# Altium PCB FPGA-Oscilloscope-route-01.PcbDoc (part 4 of 4)
Units mil, origin at the board's own origin, x right, y up, seen from the top; angles counter-clockwise.
Board outline 8300 x 5800 mil, 2 copper layers (Top Layer, Bottom Layer); 257 components, 397 nets, 1971 pads, 530 vias.
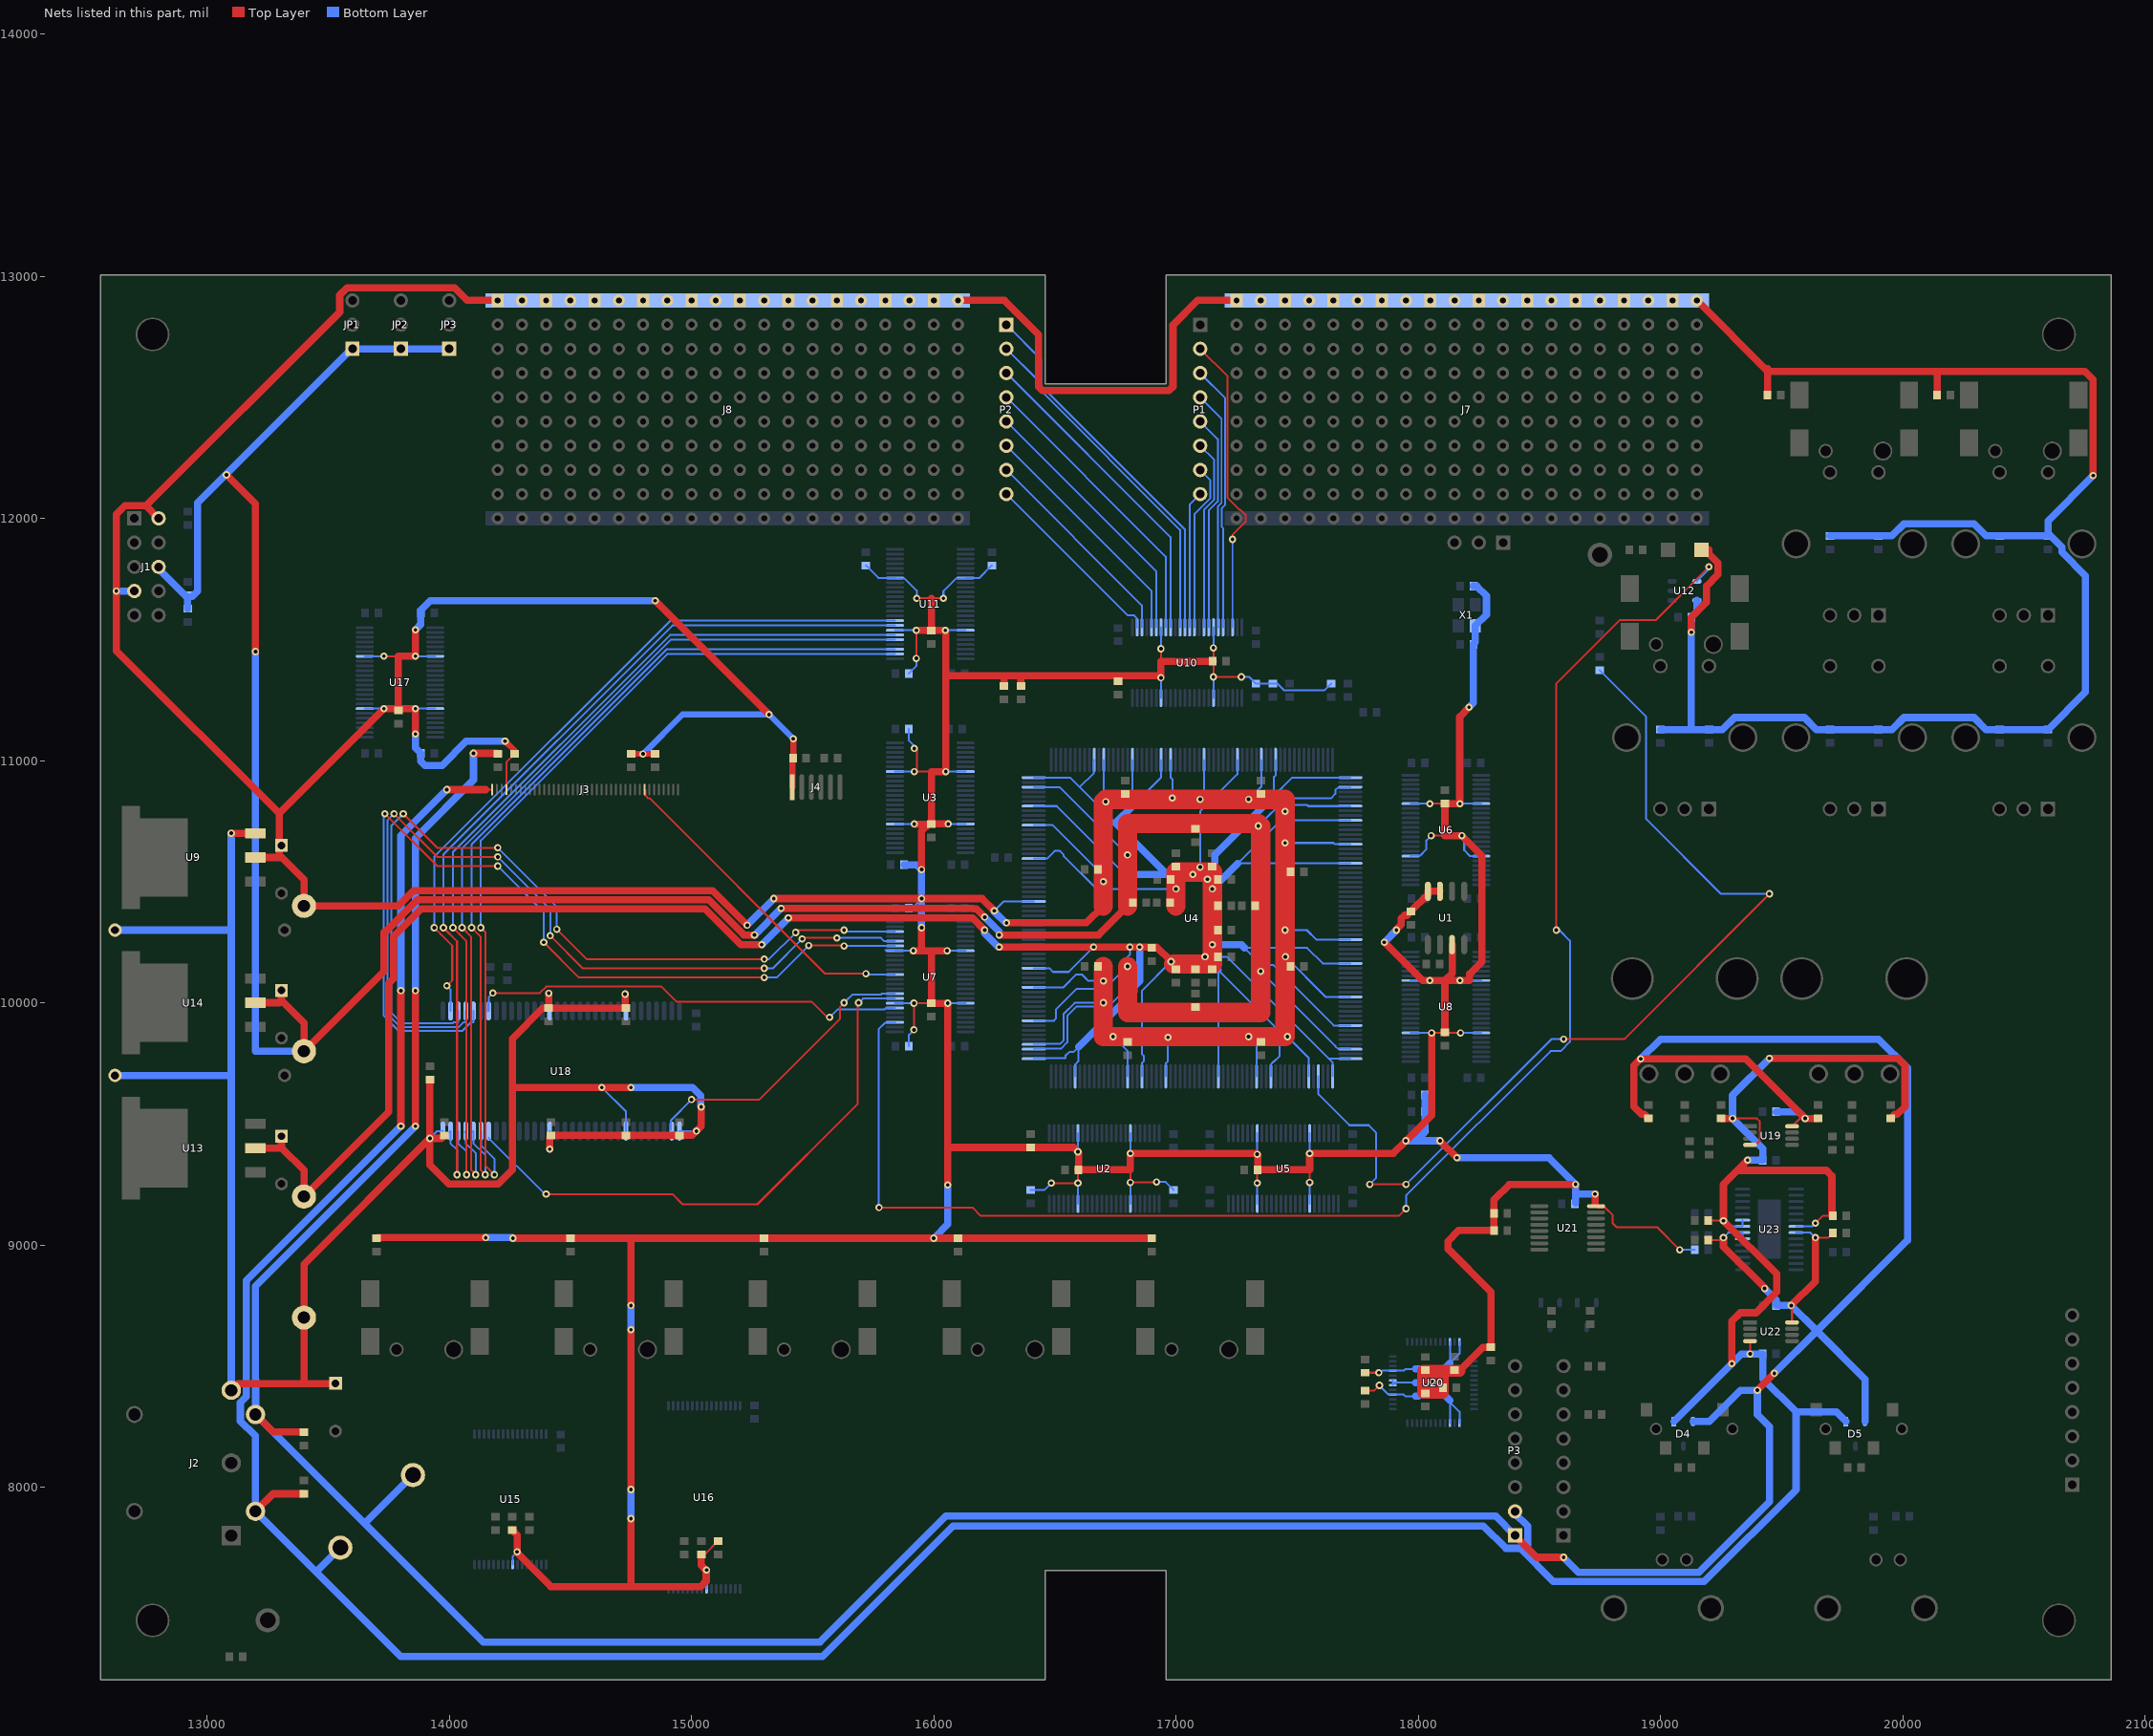
[diagram p4: the nets of this part, all layers, seen from the top]

## Via types
v1: diameter 30, hole 15, Top Layer to Bottom Layer, 530 vias

## Nets (pads, with @x,y where several pads share a name; then routed paths per layer and width w, separated by ;. In a path a pad name is that pad's centre, name@x,y a point inside that pad or via, vN(x,y) a via of type N, cw(c..) or ccw(c..) an arc to the next point about the centre after c; other vN are vias at no path point) (continued)
UB1: P1.2 U10.22 | length 1251.6
  Top Layer w7.8: P1.2@17100,12700 17213.3,12586.7 17213.3,12084.8 17261.4,12036.7 17265.2,12036.7 17286.7,12015.2 17286.7,11984.8 17233.38,11931.48 v1(17233.38,11913.38)
  Bottom Layer w7.8: U10.22@17233.38,11550 v1(17233.38,11913.38)
UB2: P1.3 U10.20 | length 1101.6
  Bottom Layer w7.8: P1.3@17100,12600 17203.63,12496.37 17203.63,12055.89 17188.3,12040.56 17188.3,11965.15 17194.01,11959.44 U10.20@17194.01,11550
UB3: P1.4 U10.19 | length 993.5
  Bottom Layer w7.8: P1.4@17100,12500 17188.03,12411.97 17188.03,12063.54 17172.7,12048.21 17172.7,11551.63 U10.19@17174.33,11550
UB4: P1.5 U10.17 | length 895.5
  Bottom Layer w7.8: P1.5@17100,12400 17172.43,12327.57 17172.43,12070 17134.96,12032.53 U10.17@17134.96,11550
UB5: P1.6 U10.16 | length 790.8
  Bottom Layer w7.8: P1.6@17100,12300 17156.83,12243.17 17156.83,12076.46 17115.27,12034.91 U10.16@17115.27,11550
UB6: P1.7 U10.14 | length 694.1
  Bottom Layer w7.8: U10.14@17075.9,11550 17075.9,12017.6 17141.23,12082.92 17141.23,12158.77 P1.7@17100,12200
UB7: P1.8 U10.13 | length 568.1
  Bottom Layer w7.8: U10.13@17056.22,11550 17056.22,12056.22 P1.8@17100,12100
UB8: P2.1 U10.12 | length 1555.1
  Bottom Layer w7.8: P2.1@16300,12800 16443.3,12656.7 16443.3,12548.08 17036.53,11954.85 U10.12@17036.53,11550
UB9: P2.2 U10.11 | length 1446.9
  Bottom Layer w7.8: P2.2@16300,12700 16427.7,12572.3 16427.7,12541.62 17016.85,11952.47 U10.11@17016.85,11550
UB10: P2.3 U10.9 | length 1330.6
  Bottom Layer w7.8: P2.3@16300,12600 16977.48,11922.52 U10.9@16977.48,11550
UB11: P2.4 U10.8 | length 1222.5
  Bottom Layer w7.8: P2.4@16300,12500 16957.79,11842.21 U10.8@16957.79,11550
UB12: P2.5 U10.6 | length 1106.2
  Bottom Layer w7.8: P2.5@16300,12400 16918.42,11781.58 U10.6@16918.42,11550
UB13: P2.6 U10.5 | length 998
  Bottom Layer w7.8: P2.6@16300,12300 16898.74,11701.26 U10.5@16898.74,11550
UB14: P2.7 U10.3 | length 881.7
  Bottom Layer w7.8: P2.7@16300,12200 16859.37,11640.63 U10.3@16859.37,11550
UB15: P2.8 U10.2 | length 789
  Bottom Layer w7.8: P2.8@16300,12100 16800.9,11599.1 16827.29,11599.1 16837.61,11588.79 16837.61,11552.08 U10.2@16839.68,11550
V12+: C22.2 C54.2 C61.1 C62.1 C64.2 D4.2 D5.2 J2.4 JP4.1 P3.1 R62.1 R89.1 R90.1 U19.8 U22.8 U23.8 U23.20 U23.21 | length 17451.3
  Top Layer w8: C61.1@19197.56,9020 19250,9020 v1(19260,9030) ; v1(19540,8750) 19543.23,8746.77 U22.8@19543.23,8680 ; U19.8@19543.23,9490 19575.67,9522.44 v1(19597.56,9522.44) ; v1(19640,9030) 19692.44,9030 C64.2@19712.44,9050
  Top Layer w30: J2.4@13200,8300 13272.44,8227.56 C22.2@13400,8227.56 ; v1(13860,9490) v1(13860,10050) ; v1(14100,11030) R62.1@14197.56,11030 ; P3.1@18400,7800 18490,7710 v1(18600,7710) ; R89.1@18950,9522.44 18933.43,9539.01 18922.84,9539.01 18890.19,9571.66 18890.19,9740.19 v1(18918.47,9768.47) 19351.53,9768.47 v1(19597.56,9522.44) R90.1@19650,9522.44 ; v1(19260,9030) 19260,8993.46 19430,8823.46 v1(19430,8820) ; v1(19400,8400) v1(19470,8470) ; v1(19540,8750) 19640,8850 v1(19640,9030)
  Bottom Layer w8: v1(19260,9030) 19280.87,9050.87 U23.21@19339.53,9050.87 U23.20@19339.53,9025.28 ; U23.8@19560,9050.87 19619.13,9050.87 v1(19640,9030)
  Bottom Layer w30: 13655,7855 JP4.1@13850,8050 ; v1(13860,9490) 13200,8830 13200,8442.27 13200.6,8441.67 13200.6,8300.6 J2.4@13200,8300 14140,7360 15530,7360 16050,7880 18320,7880 P3.1@18400,7800 ; v1(13860,10050) 13860,10680 14100,10920 v1(14100,11030) ; v1(18600,7710) 18662.2,7647.8 19157.8,7647.8 19450,7940 19450,8250 19400,8300 v1(19400,8400) 19330,8400 19201.18,8271.18 D4.2@19134.49,8271.18 ; v1(18918.47,9768.47) 19000,9850 19900,9850 20020,9730 20020,9020 19645,8645 ; v1(19430,8820) 19477.56,8772.44 C54.2@19477.56,8750 v1(19540,8750) 19645,8645 ; v1(19470,8470) 19645,8645 ; C62.1@19477.56,9550 19570,9550 v1(19597.56,9522.44) ; D5.2@19844.49,8271.18 19844.49,8445.51 19645,8645
V12-: C23.2 C58.2 C65.2 C67.1 C68.1 D4.1 D5.1 J2.2 J3.1 JP5.1 P3.2 R91.1 R92.1 U19.4 U22.4 U23.7 U23.22 U23.23 | length 16289.7
  Top Layer w8: 14150,10880 14175.6,10880 J3.1@14176.22,10880.63 ; C67.1@19197.56,9100 v1(19260,9100) ; v1(19297.56,9522.44) 19397.56,9522.44 19410.34,9509.66 19410.34,9430.26 19398.24,9418.16 19374.93,9418.16 U19.4@19370,9413.23 ; v1(19370,8550) U22.4@19370,8603.23 ; v1(19640,9090) 19670,9120 C68.1@19712.44,9120
  Top Layer w30: J2.2@13200,7900 13272.44,7972.44 C23.2@13400,7972.44 ; v1(13800,9490) v1(13800,10050) ; v1(13990,10880) 14150,10880 ; R91.1@19250,9522.44 v1(19297.56,9522.44) ; v1(19294.57,8510) 19294.57,8684.57 19330,8720 19394.41,8720 19480,8805.59 19480,8880 v1(19260,9100) 19260,9250 19318.77,9308.77 ; v1(19360,9350) 19318.77,9308.77 ; v1(19450,9770) 19980,9770 20009.81,9740.19 20009.81,9571.66 19977.16,9539.01 19966.57,9539.01 R92.1@19950,9522.44 ; C68.1@19712.44,9120 19707.8,9120 19707.8,9285.66 19685.66,9307.8 19322.2,9307.8 19321.23,9308.77 19318.77,9308.77
  Bottom Layer w8: v1(19260,9100) 19283.54,9076.46 U23.22@19339.53,9076.46 U23.23@19339.53,9102.05 ; U23.7@19560,9076.46 19626.46,9076.46 v1(19640,9090)
  Bottom Layer w30: JP5.1@13550,7750 13450,7650 ; v1(13800,9490) 13162.2,8852.2 13162.2,8426.61 13162.8,8426.01 13162.8,8373.99 13137.2,8348.39 13137.2,8273.99 13200,8211.19 J2.2@13200,7900 13450,7650 ; v1(13800,10050) 13800,10690 v1(13990,10880) ; P3.2@18400,7900 18400,7891.3 18452.33,7838.97 18452.33,7761.03 18438.97,7747.67 18420,7747.67 ; D4.1@19055.75,8271.18 v1(19294.57,8510) 19334.57,8550 v1(19370,8550) C58.2@19422.44,8550 19422.44,8447.56 19560,8310 ; v1(19360,9350) C65.2@19422.44,9350 19422.44,9397.56 v1(19297.56,9522.44) 19297.56,9617.56 v1(19450,9770) ; D5.1@19765.75,8271.18 19726.93,8310 19560,8310 ; 13450,7650 13800,7300 15540,7300 16080,7840 18268.7,7840 18361.03,7747.67 18420,7747.67 ; 18420,7747.67 18557.67,7610 19180,7610 19560,7990 19560,8310
V\S\Y\N\C\: J3.33 U7.13 | length 1363.4
  Top Layer w7.8: J3.33@14806.14,10880.63 14810.19,10876.58 14810.19,10854.46 14819.35,10845.3 14826.53,10845.3 15551.84,10120 v1(15720,10120)
  Bottom Layer w7.8: v1(15720,10120) 15723.78,10116.22 U7.13@15840,10116.22
VAB0: U7.19 U18.37 | length 3806.4
  Top Layer w7.8: v1(13734.4,10780) 13950,10564.4 v1(14200,10564.4) ; v1(14390,10250) 14535.6,10104.4 v1(15300,10104.4) ; v1(15483.46,10236.54) v1@15630,10236.54
  Bottom Layer w7.8: v1(13734.4,10780) 13728.8,10774.4 13728.8,9947.08 13792.08,9883.79 14053.96,9883.79 14090.17,9920 14099.61,9920 U18.37@14099.61,9966.06 ; v1(14200,10564.4) 14390,10374.4 v1(14390,10250) ; v1(15300,10104.4) 15351.31,10104.4 v1(15483.46,10236.54) ; v1(15630,10234.33) U7.19@15840,10234.33
VAB1: U7.20 U18.36 | length 3692.1
  Top Layer w7.8: v1(13772.2,10780) 13950,10602.2 v1(14200,10602.2) ; v1(14416.73,10276.73) 14551.26,10142.2 v1(15300,10142.2) ; v1(15456.73,10263.27) 15461.26,10267.8 v1(15600,10267.8)
  Bottom Layer w7.8: v1(13772.2,10780) 13744.4,10752.2 13744.4,9953.54 13798.55,9899.39 14038.07,9899.39 14058.68,9920 14068.11,9920 U18.36@14068.11,9966.06 ; v1(14200,10602.2) 14416.73,10385.47 v1(14416.73,10276.73) ; v1(15300,10142.2) 15335.66,10142.2 v1(15456.73,10263.27) ; v1(15600,10267.8) 15782.2,10267.8 15795.99,10254.01 U7.20@15840,10254.01
VAB2: U7.22 U18.35 | length 3569.2
  Top Layer w7.8: v1(13810,10780) 13950,10640 v1(14200,10640) ; v1(14443.46,10303.46) 14566.91,10180 v1(15300,10180) ; v1(15430,10290) 15440,10300 15624.4,10300 v1@15630,10305.6
  Bottom Layer w7.8: v1(13810,10780) 13760,10730 13760,9960 13805.01,9914.99 14014.04,9914.99 14019.05,9920 14036.61,9920 U18.35@14036.61,9966.06 ; v1(14200,10640) 14443.46,10396.54 v1(14443.46,10303.46) ; v1(15300,10180) 15320,10180 v1(15430,10290) ; v1@15630,10293.38 U7.22@15840,10293.38
  other v1: 15630,10300
VAB3: U11.9 U18.34 | length 2988.9
  Top Layer w8: v1(13937.86,10310) 13937.86,10309.9 13964.56,10283.2 13964.66,10283.2 14012.2,10235.66 14012.2,10092.2 v1(13990,10070)
  Bottom Layer w8: v1(13937.86,10310) 13937.86,10602.73 14912.61,11577.48 U11.9@15840,11577.48 ; v1(13990,10070) 14005.12,10054.88 U18.34@14005.12,9966.06
VAB4: U11.8 U18.31 | length 3798.4
  Top Layer w8: v1(13975.66,10310) 14031.89,10253.77 v1(14031.89,9290)
  Bottom Layer w7.8: U18.31@14001.25,9466.14 U18.31@14005.12,9470
  Bottom Layer w8: v1(13975.66,10310) 13975.66,10612.69 14920.76,11557.8 U11.8@15840,11557.8 ; U18.31@14005.12,9470 14005.12,9420 14031.89,9393.23 v1(14031.89,9290)
VAB5: U11.6 U18.30 | length 3751.5
  Top Layer w8: v1(14015.03,10310) 14015.03,10309.9 14041.73,10283.2 14041.83,10283.2 14071.26,10253.77 v1(14071.26,9290)
  Bottom Layer w7.8: U18.30@14032.75,9466.14 U18.30@14036.61,9470
  Bottom Layer w8: v1(14015.03,10310) 14015.03,10622.06 14911.39,11518.42 U11.6@15840,11518.42 ; U18.30@14036.61,9470 14036.61,9420 14071.26,9385.35 v1(14071.26,9290)
VAB6: U11.5 U18.29 | length 3717.1
  Top Layer w8: v1(14052.83,10310) 14090.94,10271.89 14090.94,9308.22 14109.06,9290.1 v1(14109.06,9290)
  Bottom Layer w7.8: U18.29@14064.25,9466.14 U18.29@14068.11,9470
  Bottom Layer w8: v1(14052.83,10310) 14052.83,10637.52 14914.05,11498.74 U11.5@15840,11498.74 ; U18.29@14068.11,9470 14068.11,9420 14109.06,9379.05 v1(14109.06,9290)
VAB7: U11.3 U18.28 | length 3674.7
  Top Layer w8: v1(14092.2,10310) 14092.2,10309.9 14118.9,10283.2 14119,10283.2 14130.32,10271.89 14130.32,9308.11 v1(14148.43,9290)
  Bottom Layer w7.8: U18.28@14095.74,9466.14 U18.28@14099.61,9470
  Bottom Layer w8: v1(14092.2,10310) 14092.2,10654.54 14897.03,11459.37 U11.3@15840,11459.37 ; U18.28@14099.61,9470 14099.61,9420 14148.43,9371.18 v1(14148.43,9290)
VAB8: U11.2 U18.27 | length 3634.9
  Top Layer w8: v1(14130,10310) 14150,10290 14150,9326.33 14186.23,9290.1 v1(14186.23,9290)
  Bottom Layer w8: v1(14130,10310) 14130,10670 14899.68,11439.68 U11.2@15840,11439.68 ; U18.27@14131.1,9470 14131.1,9410.85 14186.23,9355.72 v1(14186.23,9290)
VCC: C2.1 C3.2 C4.2 C5.2 C6.2 C7.2 C8.2 C9.2 C10.2 C11.2 C12.2 C13.2 C14.2 C15.2 C16.2 C17.2 C18.2 C19.2 C20.2 C21.2 C42.2 C43.2 C44.2 C45.2 C46.2 C55.2 C69.2 C70.2 C71.2 C72.2 C73.2 C74.2 D1.1 J1.4 J1.6 J3.4 J4.1 J7.PGVCC J8.PGVCC JP6.1 R3.2 R4.2 R5.2 R9.2 R11.2 R12.1 R14.1 R15.1 R16.1 R17.1 R19.1 R20.1 R35.2 R37.2 R42.1 R43.1 R46.1 R47.2 R53.2 R54.2 R59.1 R64.1 R66.1 R67.2 R68.2 R73.1 R74.1 R75.1 R88.2 R93.2 R94.2 R95.2 R96.2 R97.2 R98.2 R99.2 R100.2 R101.2 R102.2 R103.2 R104.2 R105.2 R106.2 R107.2 R108.2 R109.2 U1.3 U1.7 U1.8 U2.7 U2.18 U2.31 U2.42 U3.7 U3.18 U3.31 U3.42 U4.7 U4.15 U4.35 U4.47 U4.66 U4.77 U4.96 U4.104 U4.124 U4.136 U4.154 U4.170 U4.192 U4.206 U4.213 U4.225 U5.7 U5.18 U5.31 U5.42 U6.7 U6.18 U6.31 U6.42 U7.7 U7.18 U7.31 U7.42 U8.7 U8.18 U8.31 U8.42 U9.2 U10.7 U10.18 U10.31 U10.42 U11.7 U11.18 U11.31 U11.42 U12.5 U15.8 U16.8 U17.7 U17.18 U17.31 U17.42 U20.13 U20.15 U20.28 U20.30 U20.31 U20.33 U20.46 U20.48 U21.16 X1.4 | length 55630.8
  Top Layer w8: v1(13730,11430.87) 13790,11430.87 ; C44.2@13783.22,11214.33 13790,11214.33 C44.2@13796.78,11214.33 ; J3.4@14235.28,10880.63 14235.28,10992.83 C46.2@14270,11027.56 ; C42.2@15040,7722.44 15054.88,7722.44 R59.1@15110,7777.56 ; v1(15918.11,9888.11) v1(15918.11,9998.11) C16.2@15990,9998.11 ; v1(15928.11,11421.89) v1(15928.11,11538.11) ; v1@15930,11050 15930,10964.65 v1(15920,10954.65) 15990,10954.65 ; v1(15930,11670) 15990,11670 v1(16040,11670) ; v1(16485.36,9255.36) v1(16595.36,9255.36) C4.2@16595.36,9310 ; 16811.89,9310 v1(16811.89,9258.11) 16918.11,9258.11 v1(16920,9260) ; v1(16938.11,11341.89) v1@16938.11,11350 ; 16938.11,11410 v1(16938.11,11461.89) ; v1(17154.64,11465.36) 17154.64,11410 v1(17154.64,11345.36) v1@17264.64,11345.36 ; v1(17335.36,9255.36) C5.2@17335.36,9310 ; v1(17551.89,9258.11) 17551.89,9310 ; C69.2@17780,8397.56 17817.56,8397.56 v1(17840,8420) ; C74.2@17780,8472.44 v1(17837.56,8472.44) ; v1(18048.11,10821.89) C3.2@18110,10821.89 ; v1(18053.31,10690) 18110,10690 ; v1(18055.35,9875.35) 18110,9875.35 v1(18174.65,9875.35) ; v1(18730,9210) 18734.25,9205.75 U21.16@18734.25,9160 18740.17,9154.08 18771.93,9154.08 18803.2,9122.81 18803.2,9088.9 18818.9,9073.2 18986.8,9073.2 v1(19080,8980)
  Top Layer w25: v1(14230,11080) C46.2@14270,11040 ; 14770,11027.56 v1(14800,11027.56) R68.2@14840,11027.56 ; J4.1@15416.22,10890.63 C45.2@15416.22,11008.18 ; C45.2@15420,11011.96 v1(15420,11090)
  Top Layer w30: J1.6@12800,12000 12747.67,12052.33 ; U9.2@13200,10600 13297.56,10600 13297.56,10781.89 ; 13308.15,10600 13400,10508.15 JP6.1@13400,10400 13789.63,10400 13853.03,10463.4 15086.6,10463.4 v1(15230,10320) ; R99.2@13702.44,9030 v1(14150,9030) ; C44.2@13783.22,11214.33 v1(13730,11214.33) 13297.56,10781.89 ; C44.2@13790,11214.33 13790,11430.87 v1(13860,11430.87) v1(13860,11540) ; C44.2@13796.78,11214.33 v1(13860,11214.33) v1(13860,11110) ; J8.PGVCC@14200,12900 14074,12900 14021.67,12952.33 13578.33,12952.33 13547.67,12921.67 13547.67,12852.33 12747.67,12052.33 ; C43.2@14260,7822.44 14280,7802.44 v1(14280,7732.56) 14280,7729.1 14419.74,7589.36 14750,7589.36 ; v1(14262.44,9027.56) R98.2@14500,9027.56 14750,9027.56 ; v1(14750,7870) 14750,7589.36 ; v1(14750,7990) v1(14750,8650) ; v1(14750,8750) 14750,9027.56 ; v1(14850,11660) v1(15320,11190) ; C42.2@15040,7722.44 15040,7676.86 15060.64,7656.22 15060.64,7611.51 15038.49,7589.36 14750,7589.36 ; v1(15340,10430) v1(15950,10430) 16200,10430 v1(16250,10380) ; v1(15915.36,10214.64) 15950,10214.64 ; v1@15920.55,10737.56 C9.2@15978.41,10737.56 ; v1(15928.11,11538.11) C7.2@15990,11538.11 ; v1(15950,10310) 15950,10214.64 ; v1(15950,10550) 15949.48,10550.52 15949.48,10708.63 C9.2@15978.41,10737.56 ; C16.2@15990,9997.56 16057.56,9997.56 16057.56,9402.44 ; C16.2@15990,9998.11 15990,10214.64 ; C7.2@15990,11537.56 C7.2@15990,11538.11 ; 15990,11670 C7.2@15990,11538.11 ; v1(16055.36,10214.64) 15990,10214.64 ; v1(16057.56,9247.56) 16057.56,9402.44 ; v1(16060,10738.11) C9.2@15990,10738.11 ; J8.PGVCC@16100,12900 16291.3,12900 16432.2,12759.1 16432.2,12543.48 16448.48,12527.2 16971.52,12527.2 16987.8,12543.48 16987.8,12797.8 17090,12900 J7.PGVCC@17250,12900 ; R17.1@16290,11307.56 16290,11336 ; v1(16300,10330) 16630,10330 16700,10400 ; R16.1@16360,11307.56 16360,11350 ; C4.2@16595.36,9310 C4.2@16597.56,9310 ; R95.2@16900,9027.56 R96.2@16100,9027.56 v1(16000,9027.56) R97.2@15300,9027.56 14750,9027.56 ; C8.2@17154.64,11410 C8.2@17152.44,11410 16938.11,11410 16938.11,11350 16360,11350 ; C5.2@17335.36,9310 C5.2@17337.56,9310 ; v1(17860,10250) 18018.11,10091.89 v1(18048.11,10091.89) 18110,10091.89 ; v1(17910,10300) 17910,10302.42 17929.48,10321.9 17929.48,10347.63 17942.84,10360.99 17953.43,10360.99 C12.2@17970,10377.56 U1.8@18040,10447.56 ; U1.8@18040,10460 U1.7@18090,10460 ; v1(18055.35,9875.35) 18055.35,9536.46 v1(17948.9,9430) 17897.01,9378.11 v1(17551.89,9378.11) 17551.89,9310 C5.2@17337.56,9310 ; v1(18090,9430) v1(18160,9360) ; C6.2@18110,9875.35 C6.2@18110,9877.56 18110,10091.89 ; C3.2@18110,10821.89 18110,10690 v1(18180,10690) 18262.6,10607.4 18262.6,10169.14 18211.89,10118.43 18211.89,10091.89 v1(18171.89,10091.89) 18110,10091.89 ; C3.2@18110,10822.44 18171.34,10822.44 18171.34,11181.34 v1(18210,11220) ; U1.3@18140,10240 18140,10121.89 18110,10091.89 ; 18170,8480 18267.56,8577.56 R75.1@18300,8577.56 18300,8806.54 18122.2,8984.34 18122.2,9015.66 18166.54,9060 R74.1@18312.44,9060 R73.1@18312.44,9130 18312.44,9185.9 18376.54,9250 v1(18650,9250) ; 18730,9170 v1(18730,9210) ; v1(19127.56,11530) 19127.56,11591.65 19190,11654.09 19190,11720 19237.8,11767.8 19237.8,11815.66 19200,11853.46 19200,11870 D1.1@19168.9,11870 ; J7.PGVCC@19150,12900 19442.44,12607.56 ; R94.2@19442.44,12510 19442.44,12617.56 ; 19450,12607.56 20142.44,12607.56 ; R93.2@20142.44,12510 20142.44,12607.56 ; v1(20786.58,12176.58) 20786.58,12572.99 20752.01,12607.56 20142.44,12607.56 ; 12747.67,12052.33 12661.03,12052.33 12625.6,12016.9 v1(12625.6,11700) 12625.6,11453.85 13297.56,10781.89 ; 15950,10214.64 15990,10214.64 ; C9.2@15978.41,10737.56 15978.97,10738.11 C9.2@15990,10738.11 ; C9.2@15990,10738.11 15990,10954.65 v1(16050,10954.65) 16050,11350 ; C7.2@15990,11538.11 v1(16048.11,11538.11) 16050,11536.22 16050,11350 ; 16050,11350 16360,11350 ; 16057.56,9402.44 R12.1@16400,9402.44 16577.56,9402.44 v1(16595.36,9384.64) 16597.56,9382.44 C4.2@16597.56,9310 ; C4.2@16597.56,9310 16811.89,9310 v1(16811.89,9378.11) 17331.89,9378.11 v1(17335.36,9374.64) 17337.56,9372.44 C5.2@17337.56,9310
  Top Layer w50: 18170,8480 18100,8480 ; 18060,8390 18100,8390 18100,8480 ; 18060,8390 v1(18060,8435) 18060,8480 ; 18060,8390 18020,8390 18020,8480 18060,8480 ; 18060,8480 18100,8480
  Top Layer w80: 16700,10150 v1(16700,10090) v1(16700,10000) 16700,9860 v1(16740,9860) v1(17300,9860) 17450,9860 v1(17450,10300) v1(17450,10660) v1(17450,10790) 17450,10840 v1(17300,10840) v1(17100,10840) v1@16710,10840 ; 16700,10400 v1(16700,10500) v1@16700,10830
  Bottom Layer w8: U17.31@13650.94,11214.33 v1@13715.67,11214.33 ; U17.42@13650.94,11430.87 v1@13719.13,11430.87 ; v1(13860,11430.87) U17.7@13942.28,11430.87 ; v1@13874.33,11214.33 U17.18@13942.28,11214.33 ; U15.8@14262.2,7680 14262.2,7714.76 v1(14280,7732.56) ; U16.8@15062.21,7580 v1(15062.21,7657.79) ; R53.2@15720,11805.84 15771.2,11754.65 U11.18@15840,11754.65 15841.98,11752.67 15878.83,11752.67 15930,11701.5 v1(15930,11670) ; 15801.17,10216.62 15838.02,10216.62 U7.18@15840,10214.64 v1(15915.36,10214.64) ; U7.7@15840,9998.11 v1(15918.11,9998.11) ; U3.7@15840,10738.11 v1(15920,10738.11) ; U3.18@15840,10954.65 v1@15905.35,10954.65 ; U11.7@15840,11538.11 v1(15928.11,11538.11) ; R35.2@15892.59,10390 R35.2@15897.56,10390 15910,10390 v1(15950,10430) ; R37.2@15897.56,9820 15897.56,9867.56 v1(15918.11,9888.11) ; R14.1@15897.56,11130 15897.56,11082.44 v1@15930,11050 ; R47.2@15897.56,11360 15928.11,11390.55 v1(15928.11,11421.89) ; v1(16040,11670) 16040,11700.16 16092.51,11752.67 16129.36,11752.67 U11.31@16131.34,11754.65 16188.8,11754.65 R54.2@16240,11805.84 ; v1(16048.11,11538.11) U11.42@16131.34,11538.11 ; v1(16050,10954.65) U3.31@16131.34,10954.65 ; v1(16055.36,10214.64) U7.31@16131.34,10214.64 ; v1(16058.11,9998.11) U7.42@16131.34,9998.11 ; v1(16060,10738.11) U3.42@16131.34,10738.11 ; v1(16250,10380) 16288.19,10418.19 U4.154@16412.91,10418.19 ; R9.2@16400,9227.56 16457.56,9227.56 v1(16485.36,9255.36) ; U4.124@16412.91,9827.64 16414.89,9829.62 16521.96,9829.62 16535.8,9843.46 16535.8,9952.88 16582.35,9999.43 16699.43,9999.43 v1(16700,10000) ; U4.136@16412.91,10063.86 16535.96,10063.86 16588.9,10116.8 16611.1,10116.8 16626.8,10101.1 16626.8,10100.92 16637.72,10090 v1(16700,10090) ; U4.170@16412.91,10733.15 16491.3,10733.15 16700,10524.45 v1(16700,10500) ; U2.18@16595.36,9170 v1(16595.36,9255.36) ; v1(16595.36,9384.64) U2.31@16595.36,9461.34 ; U4.192@16702.28,11002.83 16702.28,10837.72 v1(16710,10830) ; v1(16740,9860) 16800.71,9799.29 U4.104@16800.71,9695.75 ; U2.7@16811.89,9170 v1(16811.89,9258.11) ; v1(16811.89,9378.11) U2.42@16811.89,9461.34 ; v1(16920,9260) 16957.56,9260 R11.2@16990,9227.56 ; U10.42@16938.11,11258.66 v1(16938.11,11341.89) ; v1(16938.11,11461.89) U10.7@16938.11,11550 ; U4.96@16958.19,9695.75 16958.19,9750.29 16966.8,9758.9 v1(16966.8,9856.8) ; U4.206@16977.87,11002.83 16977.87,10930.03 16984.99,10922.91 v1(16984.99,10845.01) ; v1(17100,10840) 17115.67,10855.67 U4.213@17115.67,11002.83 ; U10.31@17154.64,11258.66 v1(17154.64,11345.36) ; v1(17154.64,11465.36) U10.18@17154.64,11550 ; v1@17264.64,11345.36 17302.2,11345.36 R43.1@17330,11317.56 R19.1@17400,11317.56 17419.85,11317.56 17447.4,11290.01 17612.45,11290.01 R20.1@17640,11317.56 ; v1(17300,9860) 17332.21,9827.79 U4.77@17332.21,9695.75 ; v1(17300,10840) 17351.89,10891.89 U4.225@17351.89,11002.83 ; U5.18@17335.36,9170 v1(17335.36,9255.36) ; v1(17335.36,9374.64) U5.31@17335.36,9461.34 ; v1(17450,10300) 17540,10300 17579.29,10260.71 U4.35@17720,10260.71 ; v1(17450,10660) 17650,10660 17655.59,10654.41 U4.15@17720,10654.41 ; v1(17450,10790) 17476.8,10816.8 17541.1,10816.8 17546.01,10811.89 U4.7@17720,10811.89 ; v1(17451.65,10190) 17617.17,10024.49 U4.47@17720,10024.49 ; v1(17460,9860) 17548.74,9771.26 U4.66@17548.74,9695.75 ; U5.7@17551.89,9170 v1(17551.89,9258.11) ; v1(17551.89,9378.11) U5.42@17551.89,9461.34 ; v1(17837.56,8472.44) 17840,8470 17850.95,8480.95 U20.33@17895.35,8480.95 17940.53,8480.95 17947.64,8488.06 17990,8488.06 ; v1(17840,8420) 17877.48,8382.52 U20.28@17895.35,8382.52 17939.58,8382.52 17946.69,8375.41 17990,8375.41 ; U20.30@17895.35,8421.89 17895.35,8431.73 ; U20.31@17895.35,8441.58 17895.35,8431.73 ; U8.31@17968.66,9875.35 v1(18055.35,9875.35) ; U8.42@17968.66,10091.89 v1(18048.11,10091.89) ; U6.31@17968.66,10605.35 17970.64,10607.33 18007.49,10607.33 18033.66,10633.51 18033.66,10670.36 v1(18053.31,10690) ; U6.42@17968.66,10821.89 v1(18048.11,10821.89) ; 17990,8431.73 17895.35,8431.73 ; U20.15@18131.57,8264.41 18131.57,8350.53 ; 18131.57,8358.43 18131.57,8350.53 ; U20.46@18131.57,8599.06 18131.57,8511.57 18170.85,8550.85 18170.85,8598.96 U20.48@18170.94,8599.06 ; U20.13@18170.94,8264.41 18170.94,8311.16 18131.57,8350.53 ; v1(18171.89,10091.89) U8.7@18260,10091.89 ; v1(18171.89,10821.89) U6.7@18260,10821.89 ; v1(18174.65,9875.35) U8.18@18260,9875.35 ; v1(18180,10690) 18190,10680 18190,10630 18214.65,10605.35 U6.18@18260,10605.35 ; v1(19080,8980) R88.2@19142.44,8980
  Bottom Layer w25: v1(14800,11027.56) 14962.44,11190 v1(15320,11190) v1(15420,11090)
  Bottom Layer w30: v1(12625.6,11700) J1.4@12700,11700 ; v1(13860,11110) 13860,11052.44 R64.1@13882.44,11030 13882.44,10997.56 13900,10980 13970,10980 14070,11080 v1(14230,11080) ; v1(13860,11540) 13882.44,11562.44 R66.1@13882.44,11610 13882.44,11620.59 13921.85,11660 v1(14850,11660) ; v1(14150,9030) 14260,9030 v1(14262.44,9027.56) ; v1(14750,7870) v1(14750,7990) ; v1(14750,8650) v1(14750,8750) ; v1(15230,10320) v1(15340,10430) ; R15.1@15877.56,10570 15930,10570 v1(15950,10550) v1(15950,10430) v1(15950,10310) ; v1(16000,9027.56) 16057.56,9085.12 v1(16057.56,9247.56) ; v1(16250,10380) 16250,10376.54 16296.54,10330 v1(16300,10330) ; v1(17860,10250) v1(17910,10300) ; v1(17948.9,9430) 17991.65,9430 ; 17990,8375.41 18000.41,8375.41 v1@18056.73,8431.73 ; 17990,8431.73 v1@18056.73,8431.73 ; 17990,8488.06 18006.94,8488.06 v1(18060,8435) v1@18056.73,8431.73 ; R3.2@18026.46,9464.8 17991.65,9430 ; R3.2@18027.56,9481.1 R5.2@18027.56,9550 R4.2@18027.56,9620 ; v1@18060,8430 18131.57,8358.43 ; v1@18060,8440 18131.57,8511.57 ; v1(18090,9430) 17991.65,9430 ; v1(18160,9360) 18540,9360 v1(18650,9250) 18650,9210 ; v1(18210,11220) 18227.56,11237.56 R46.1@18227.56,11480 18235.43,11487.88 X1.4@18235.43,11556.69 18281.86,11603.11 18281.86,11680.31 18242.17,11720 C10.2@18227.56,11720 ; C55.2@18650,9172.44 18650,9210 ; v1(18730,9210) 18650,9210 ; R104.2@19000,11127.56 R105.2@19200,11127.56 19255.46,11127.56 19305.7,11177.8 19594.3,11177.8 19644.54,11127.56 R106.2@19700,11127.56 R107.2@19900,11127.56 19955.46,11127.56 20005.7,11177.8 20294.3,11177.8 20344.54,11127.56 R108.2@20400,11127.56 R109.2@20600,11127.56 20755,11282.56 20755,11762.9 20657.2,11860.7 20657.2,11880.95 20610.59,11927.56 R101.2@20600,11927.56 ; 19127.56,11130 v1(19127.56,11530) C11.2@19127.56,11591.65 19150.55,11614.65 U12.5@19150.55,11661.65 ; R102.2@19700,11927.56 R103.2@19900,11927.56 19955.46,11927.56 20005.7,11977.8 20294.3,11977.8 20344.54,11927.56 R100.2@20400,11927.56 R101.2@20600,11927.56 ; v1(20786.58,12176.58) 20600,11990 R101.2@20600,11927.56
  other v1: 15920,11050 17270,11345.36
VCC5+: C1.1 C47.2 C48.2 C49.2 C50.2 C51.2 C52.2 C53.2 J2.5 JP12.1 R51.2 R52.2 U9.3 U18.1 U18.8 U18.18 U18.32 U18.47 U18.57 | length 9213
  Top Layer w8: C51.2@14420,9450 C51.2@14420,9452.44
  Top Layer w30: J2.5@13100,8400 13127.56,8427.56 13400,8427.56 ; v1(13100,10700) U9.3@13200,10700 ; C1.1@13529.14,8427.56 13400,8427.56 ; C53.2@13920,9682.44 v1(13920,9440) ; C52.2@13980,9452.44 13967.56,9440 v1(13920,9440) ; v1(14410.7,10039.3) 14410,10038.59 C49.2@14410,9977.56 ; v1(14414.57,9395.43) 14414.57,9447.01 C51.2@14420,9447.01 ; C51.2@14420,9452.44 C47.2@14730,9452.44 C48.2@14950,9452.44 15002.44,9452.44 v1(15020,9470) 15040,9490 v1(15040,9570.08) ; C50.2@14725.67,9981.89 v1(14725.67,10035.67) ; C50.2@14730,9977.56 C49.2@14410,9977.56 ; v1(14750,9650) v1(14630,9650) 14260,9650 ; 13400,8427.56 JP12.1@13400,8700 13400,8920 v1(13920,9440) ; v1(13920,9440) 13920,9330 13997.8,9252.2 14201.89,9252.2 14260,9310.31 14260,9650 ; 14260,9650 14260,9851.65 14385.9,9977.56 C49.2@14410,9977.56
  Bottom Layer w8: v1(13920,9440) 13950,9470 U18.32@13973.62,9470 ; v1(14410.7,10039.3) 14414.57,10035.43 U18.47@14414.57,9966.06 ; v1(14414.57,9395.43) U18.18@14414.57,9470 ; v1(14630,9650) 14729.53,9550.47 U18.8@14729.53,9470 ; v1(14725.67,10035.67) 14729.53,10031.81 U18.57@14729.53,9966.06 ; U18.1@14950,9470 v1(15020,9470)
  Bottom Layer w30: R51.2@12620,9700 13100,9700 ; R52.2@12620,10300 13100,10300 ; J2.5@13100,8400 13100,9700 ; v1(13100,10700) 13100,10300 ; v1(14750,9650) 15003.46,9650 15037.8,9615.66 15037.8,9572.28 v1(15040,9570.08) ; 13100,9700 13100,10300
VCCA: C37.1 C38.2 C39.2 C40.2 C41.2 J1.8 JP1.1 JP2.1 JP3.1 JP11.1 R1.2 R2.2 U4.3 U4.58 U4.123 U4.178 U14.2 | length 13401.3
  Top Layer w30: v1(13080,12180) 13200,12060 v1(13200,11450) ; U14.2@13200,10000 13297.56,10000 13307.09,10009.53 ; C37.1@13307.09,10051.18 13307.09,10009.53 ; 13400,9908.15 JP11.1@13400,9800 13730,10130 13730,10290 13733.09,10290 13868.69,10425.6 15070.94,10425.6 15216.54,10280 v1(15260,10280) ; 13400,9916.62 13307.09,10009.53 ; v1(15370,10390) 16160,10390 16162.2,10387.8 16175.66,10387.8 v1(16210,10353.46) ; v1(16270,10280) 16680,10280 16800,10400
  Top Layer w80: v1(16800,10150) 16800,9960 17350,9960 v1(17350,10130) v1@17350,10730 ; 16800,10400 v1(16800,10610) 16800,10740 v1@17340,10740
  Bottom Layer w8: U4.123@16412.91,9807.95 16414.89,9809.93 16524.62,9809.93 16551.6,9836.91 16551.6,9946.33 16588.9,9983.63 16678.47,9983.63 16688.9,9973.2 16711.1,9973.2 16800,10062.1 v1(16800,10150) ; U4.178@16412.91,10890.63 16519.37,10890.63 v1(16800,10610) ; v1(17340,10730) 17454.2,10844.2 17639.69,10844.2 17658.2,10862.71 17658.2,10878.28 17668.57,10888.65 17718.02,10888.65 U4.3@17720,10890.63 ; v1(17350,10130) 17658.2,9821.8 17658.2,9820.3 17668.57,9809.93 17718.02,9809.93 U4.58@17720,9807.95
  Bottom Layer w30: J1.8@12800,11800 12800,11791.85 R1.2@12909.41,11682.44 ; R2.2@12920,11627.56 R1.2@12920,11677.2 ; 12938.7,11677.2 12960.52,11699.01 12960.52,12063.97 13596.54,12700 JP1.1@13600,12700 JP2.1@13800,12700 JP3.1@14000,12700 ; v1(13200,11450) 13200,9799.21 JP11.1@13399.21,9799.21 ; v1(15260,10280) v1(15370,10390) ; v1(16210,10353.46) 16270,10293.46 v1(16270,10280)
VCCINT: C24.1 C25.2 C26.2 C27.2 C28.2 C29.2 C30.2 C31.2 C32.2 C33.2 C34.2 C35.2 C36.2 JP10.1 U4.1 U4.10 U4.19 U4.40 U4.53 U4.60 U4.61 U4.74 U4.85 U4.101 U4.115 U4.121 U4.129 U4.140 U4.163 U4.174 U4.180 U4.190 U4.198 U4.204 U4.220 U4.228 U13.2 | length 16786.7
  Top Layer w30: U13.2@13200,9400 13297.56,9400 ; C24.1@13307.09,9448.82 13307.09,9409.53 13297.56,9400 ; v1(15290,10240) 15203.09,10240 15055.29,10387.8 13884.34,10387.8 13770,10273.46 13770,10100 13750,10080 13750,9550 JP10.1@13400,9200 13400,9308.15 13308.15,9400 13297.56,9400 ; v1(15400,10350) 16160,10350 v1(16210,10300) ; v1(16270,10230) v1(16660,10230) v1(16810,10230) v1(16850,10230) 16920,10230 v1(16980,10170) v1@16990,10160
  Top Layer w80: v1@16990,10160 17150,10160 v1(17150,10240) v1(17150,10470) 17150,10540 17000,10540 v1(17000,10470) 17000,10400
  Bottom Layer w8: U4.121@16412.91,9768.58 16414.89,9770.56 16543.2,9770.56 16543.2,9781.1 16558.9,9796.8 16576.8,9796.8 16610.31,9830.31 ; U4.129@16412.91,9926.06 16496.06,9926.06 16504.2,9934.2 16504.2,9972.1 16588.9,10056.8 16704.7,10056.8 16773.2,10125.3 16773.2,10161.1 16810,10197.9 v1(16810,10230) ; U4.140@16412.91,10142.6 16477.16,10142.6 16492.35,10127.4 16557.4,10127.4 v1(16660,10230) ; U4.163@16412.91,10595.35 16467.45,10595.35 16498.9,10626.8 16521.1,10626.8 16536.8,10611.1 16536.8,10605.3 16672.1,10470 v1(17000,10470) ; U4.174@16412.91,10811.89 16508.11,10811.89 16790,10530 ; U4.180@16412.91,10930 16562.34,10930 16602.34,10890 ; U4.115@16584.17,9695.75 16584.17,9745.2 16596.8,9757.82 16596.8,9820 ; U4.190@16662.91,11002.83 16660.94,11000.86 16660.94,10948.59 16602.34,10890 ; 16750,10742.34 16602.34,10890 ; U4.198@16820.39,11002.83 16820.39,10812.74 16938.5,10930.85 U4.204@16938.5,11002.83 ; U4.101@16859.76,9695.75 16859.76,9751.7 16866.88,9758.82 16866.88,9781.02 16859.76,9788.14 16859.76,10049.76 v1(16980,10170) ; v1(17100,10560) 17100,10790 17253.47,10943.47 U4.220@17253.47,11002.83 ; v1(17120,10190) 17210,10190 17631.42,9768.58 ; U4.85@17174.73,9695.75 17174.73,10135.27 17426.8,9883.2 17426.8,9778.9 17405.45,9757.55 17403.61,9757.55 17391.26,9745.2 U4.74@17391.26,9695.75 ; 17409.05,10840.95 17409.05,10859.05 ; U4.228@17410.95,11002.83 17410.95,10938.85 17403.83,10931.73 17403.83,10846.17 17400,10850 17480,10930 U4.1@17720,10930 ; U4.61@17647.17,9695.75 17647.17,9752.83 17631.42,9768.58 ; U4.60@17720,9768.58 17631.42,9768.58 ; U4.53@17720,9906.38 17651.52,9906.38 17401.1,10156.8 17353.2,10156.8 17283.2,10226.8 17541.1,10226.8 17605.62,10162.28 U4.40@17720,10162.28 ; U4.19@17720,10575.67 17255.67,10575.67 17432.83,10752.83 U4.10@17720,10752.83
  Bottom Layer w30: v1(15290,10240) v1(15400,10350) ; v1(16210,10300) 16210,10286.54 16266.54,10230 v1(16270,10230) ; 16598.4,9818.4 16826.8,10046.8 16826.8,10066.8 16850,10090 v1(16850,10230) ; 16790,10530 16962.34,10530 ; 16820.39,10812.74 16750,10742.34 16962.34,10530 ; v1(17070,10530) 16962.34,10530 ; v1(17120,10190) 17174.73,10135.27 ; v1(17130,10510) 17160,10540 17160,10610 17409.05,10859.05 ; v1(17150,10240) 17270,10240 17283.2,10226.8 ; v1(17150,10470) 17255.67,10575.67
VRAMC\A\S\: U7.6 U18.39 | length 1854.9
  Top Layer w7.8: v1(14180,10040) 14373.65,10040 14400.35,10066.7 14875.54,10066.7 14938.94,10003.3 15496.7,10003.3 15560,9940 v1@15570,9950
  Bottom Layer w7.8: U18.39@14158.74,9964.41 U18.39@14158.74,9998.74 ; U18.39@14162.6,9966.06 14162.6,10022.6 v1(14180,10040) ; v1(15570,9940) v1@15580,9940 ; v1@15580,9950 15603.3,9973.3 15798.17,9973.3 15803.29,9978.42 U7.6@15840,9978.42
VRAMR\A\S\: U7.8 U18.26 | length 2404.8
  Top Layer w7.8: v1(14400,9210) 14921.43,9210 14963.73,9167.7 15271.72,9167.7 15686.7,9582.68 15686.7,9993.3 v1@15680,10000
  Bottom Layer w7.8: U18.26@14162.6,9441.5 14394.1,9210 v1(14400,9210) v1@14394.4,9204.4 ; v1@15680,10000 v1(15690,10000) 15707.7,10017.7 15839.91,10017.7 U7.8@15840,10017.79
VRAMT\R\G\: U7.9 U18.2 | length 1209.6
  Top Layer w7.8: v1(15000,9600) 15280,9600 15613.3,9933.3 15613.3,9983.3 v1(15630,10000)
  Bottom Layer w7.8: U18.2@14914.64,9476.22 14914.64,9514.64 v1(15000,9600) ; v1(15630,10000) 15640,10010 15663.3,10033.3 15781.06,10033.3 15785.24,10037.48 U7.9@15840,10037.48
W\D\T\R\S\T\: R55.1 U4.64 | length 4089.2
  Top Layer w8: v1(17800,9250) v1(17950,9250) ; v1(18600,9850) 18850,9850 v1(19450,10450)
  Bottom Layer w8: U4.64@17588.11,9695.75 17588.11,9621.89 17715.8,9494.2 17795.8,9494.2 17826.8,9463.2 17826.8,9276.8 v1(17800,9250) ; v1(17950,9250) 18550,9850 v1(18600,9850) ; R55.1@18750,11372.44 18940,11182.44 18940,10760 19250,10450 v1(19450,10450) v1@19460,10450
WDTCLR: U7.3 U12.4 | length 6431.6
  Top Layer w7.8: v1(15774.4,9154.4) 16159.54,9154.4 16193.94,9120 17920,9120 v1(17950,9150) ; v1(18570,10300) 18570,11318.67 18831.37,11580.05 18980.05,11580.05 v1(19200,11800)
  Bottom Layer w7.8: v1(15774.4,9154.4) 15773.3,9155.5 15773.3,9891.76 15798.83,9917.29 15837.92,9917.29 U7.3@15840,9919.37 ; v1(17950,9150) 17950,9203.5 18546.5,9800 18587.76,9800 18626.7,9838.94 18626.7,10255.72 18582.42,10300 v1(18570,10300) ; U12.4@19150.55,11740.39 19200,11789.84 v1(19200,11800)
pads on no net: J1.7 J2. J3.35 J3.37 J3.38 J3.39 J3.40 J5. J6. J7.2 J7.3 J7.4 J7.5 J7.6 J7.7 J7.8 J7.9 J7.12 J7.13 J7.14 J7.15 J7.16 J7.17 J7.18 J7.19 J8.2 J8.3 J8.4 J8.5 J8.6 J8.7 J8.8 J8.9 J8.12 J8.13 J8.14 J8.15 J8.16 J8.17 J8.18 J8.19 P4.1 P4.2 P4.3 POT1. POT2. SW1. SW1.1 SW2. SW3. SW4. SW4.1 SW5. SW5.1 SW6. SW6.1 SW7. SW7.1 SW8. SW8.1 SW9. SW9.1 SW10. SW10.1 SW11. SW11.4 SW11.5 SW12. SW12.4 SW12.5 SW13. SW13.4 SW13.5 SW14. SW14.4 SW14.5 SW15. SW15.4 SW15.5 U6.47 U7.23 U7.26 U8.26 U8.27 U8.29 U8.30 U8.32 U8.33 U9. U11.11 U11.12 U11.13 U11.14 U11.16 U11.17 U11.19 U11.20 U11.22 U11.23 U11.26 U11.27 U11.29 U11.30 U11.32 U11.33 U11.35 U11.36 U13. U14. U15.9 U16.9 U17.2 U18.40 U20.25 U20.26 U20.35 U20.36 U21.13

## Polygon pours and split planes (outlines as drawn)
AGND on Bottom Layer "analog-pour" (solid, remove dead copper, pour order 2): 17000,7250 20450,7250 20450,10150 18795.04,10150 18785.04,10160 18785.04,9647.24 18785.04,9264.96 18900,9150 18900,9010 18900,8970 18810,8880 18770,8840 18200,8840 18200,8100 17000,8100 17000,7250

## Keep-outs
Keep-Out Layer:
  lines w10: 12625,12610 12925,12610 ; 12560,7205 16460,7205 ; 12560,7205 12560,13005 ; 12560,7205 16460,7205 ; 12560,7205 12560,13005 ; 12560,13005 16460,13005 ; 12560,13005 16460,13005 ; 16460,7205 16460,7655 ; 16460,7205 16460,7655 ; 16460,7655 16960,7655 ; 16460,7655 16960,7655 ; 16460,12555 16960,12555 ; 16460,12555 16460,13005 ; 16460,12555 16960,12555 ; 16460,12555 16460,13005 ; 16960,7205 16960,7655 ; 16960,7205 20860,7205 ; 16960,7205 16960,7655 ; 16960,7205 20860,7205 ; 16960,12555 16960,13005 ; 16960,12555 16960,13005 ; 16960,13005 20860,13005 ; 16960,13005 20860,13005 ; 20860,7205 20860,13005 ; 20860,7205 20860,13005

## Other copper
Top Layer:
  rectangle: 18850,8380 19350,8480
  rectangle: 19550,8380 20050,8480
  rectangle: 16000,7245.2 16400,7645.2
  region: 20601.97,8100 20601.97,8600 20501.97,8600 20501.97,8100
  rectangle: 17000,7250 18600,7650
  rectangle: 18930,7880 19070,8030
  rectangle: 19836,7881 19976,8031

## Silkscreen, mask and mechanical layers (free items; w line width, h text height)
Top Overlay:
  rectangle: 16400,12050 17000,12500
  rectangle: 13650,8400 17350,8500
  rectangle: 19550,12600 20750,12700
  rectangle: 19550,11450 20750,11550
  rectangle: 18850,10640 20750,10750
  rectangle: 18850,10400 20050,10500
  text "MSEL" at 13620,12500 h100
  text "JTAG" at 13050,11600 h100 r90
  text "+3.3V" at 13400,10250 h60
  text "+2.5V" at 13400,9650 h60
  text "+1.2V" at 13400,9050 h60
  text "Power" at 12600,8550 h100
  text "+5V" at 13400,8550 h60
  text "+12V" at 13850,7900 h60
  text "-12V" at 13550,7600 h60
  text "GND" at 13250,7300 h60
Top Solder:
  circle w50: c16200,7450 r25
  lines w50: 16200,7450 16200,7325 cw(c16200,7450) 16308.25,7387.5
  text "DC | GND | AC" at 18870,8410 h40
  text "DC | GND | AC" at 19570,8410 h40
  text "Logic Input" at 20571.97,8120 h40 r90
  text "B" at 19876,7911 h90
  text "A" at 18970,7910 h90
  text "FPGA Oscilloscope" at 17100,7550 h80
  text "Albert Gural   2014" at 17100,7400 h80
  text "www.albertgural.com" at 17100,7300 h80
Mechanical 1:
  lines w10: 12560,7005 12560,7055 ; 12560,13105 12560,13155 ; 12560,13410 12560,13480 ; 12625,12610 12625,12910 12925,12910 12925,12610 ; 12626.87,7007.71 12560,7030 ; 12626.87,7052.29 12560,7030 ; 12626.87,13107.71 12560,13130 ; 12626.87,13152.29 12560,13130 ; 12626.87,13422.71 12560,13445 ; 12626.87,13467.29 12560,13445 ; 14116.61,7030 12560,7030 ; 14116.61,13130 12560,13130 ; 14838.39,7030 16460,7030 ; 14838.39,13130 16460,13130 ; 16393.13,7007.71 16460,7030 ; 16393.13,7052.29 16460,7030 ; 16393.13,13107.71 16460,13130 ; 16393.13,13152.29 16460,13130 ; 16430,13445 12560,13445 ; 16460,6885 16460,7085 ; 16460,13085 16460,13265 ; 16526.87,6917.71 16460,6940 ; 16526.87,6962.29 16460,6940 ; 16526.87,13197.71 16460,13220 ; 16526.87,13242.29 16460,13220 ; 16675,7205 16745,7205 ; 16675,13005 16745,13005 ; 16685,7655 16735,7655 ; 16685,12555 16735,12555 ; 16687.71,7271.87 16710,7205 16732.29,7271.87 ; 16687.71,7588.13 16710,7655 ; 16687.71,12621.87 16710,12555 ; 16687.71,12938.13 16710,13005 ; 16710,7208.4 16710,7655 ; 16732.29,7588.13 16710,7655 ; 16732.29,12621.87 16710,12555 ; 16732.29,12938.13 16710,13005 ; 16893.13,6917.71 16960,6940 ; 16893.13,6962.29 16960,6940 ; 16893.13,13197.71 16960,13220 ; 16893.13,13242.29 16960,13220 ; 16960,6915 16960,6965 ; 16960,13195 16960,13245 ; 17130,13445 20860,13445 ; 20793.13,13422.71 20860,13445 ; 20793.13,13467.29 20860,13445 ; 20860,13410 20860,13480 ; 20960,7205 21050,7205 ; 20960,13005 21050,13005 ; 20977.71,7271.87 21005,7205 ; 20977.71,12938.13 21005,13005 ; 21005,9656.61 21005,7205 ; 21005,10358.39 21005,13005 ; 21032.29,7271.87 21005,7205 ; 21032.29,12938.13 21005,13005 ; 16460,6940 16960,6940 ; 16460,13220 16960,13220 ; 16710,12555 16710,13005 ; 12560,7205 12560,13005 16460,13005 16460,12555 16960,12555 16960,13005 20860,13005 20860,7205 16960,7205 16960,7655 16460,7655 16460,7205 12560,7205 ; 12625,7300 12625,7600 12925,7600 12925,7300 12625,7300 ; 20495,7300 20495,7600 20795,7600 20795,7300 20495,7300 ; 20495,12610 20495,12910 20795,12910 20795,12610 20495,12610
  text "8300mil" at 16471.61,13411.56 h100
  text "500mil" at 16551.6,13261.56 h60
  text "3900mil" at 14171.61,13096.56 h100
  text "450mil" at 16818.44,12621.6 h60 r90
  text "5800mil" at 20971.56,10318.39 h100 r270
  text "450mil" at 16591.56,7588.4 h60 r270
  text "3900mil" at 14171.61,6996.56 h100
  text "500mil" at 16551.6,6981.56 h60
Mechanical 4:
  lines w30: 12545,7400 12545,7190 12755,7190 ; 12545,12810 12545,13020 12755,13020 ; 20665,7190 20875,7190 20875,7400

## Text inside footprints (layer, text, board x,y; h text height)
J1: Top Overlay "6" at 12780,12100 h50 r270; Top Overlay "10" at 12780,11540 h50 r270; Top Overlay "5" at 12680,11540 h50 r270; Top Overlay "1" at 12680,12100 h50 r270